# Altium PCB 400797.PcbDoc (part 8 of 8)
Units mm, origin at the board's own origin, x right, y up, seen from the top; angles counter-clockwise.
Board outline 155 x 63.5 mm, 4 copper layers (Top Layer, Mid-Layer 1, Mid-Layer 2, Bottom Layer), stack 1.514 mm thick; 333 components, 292 nets, 1555 pads, 2205 vias.
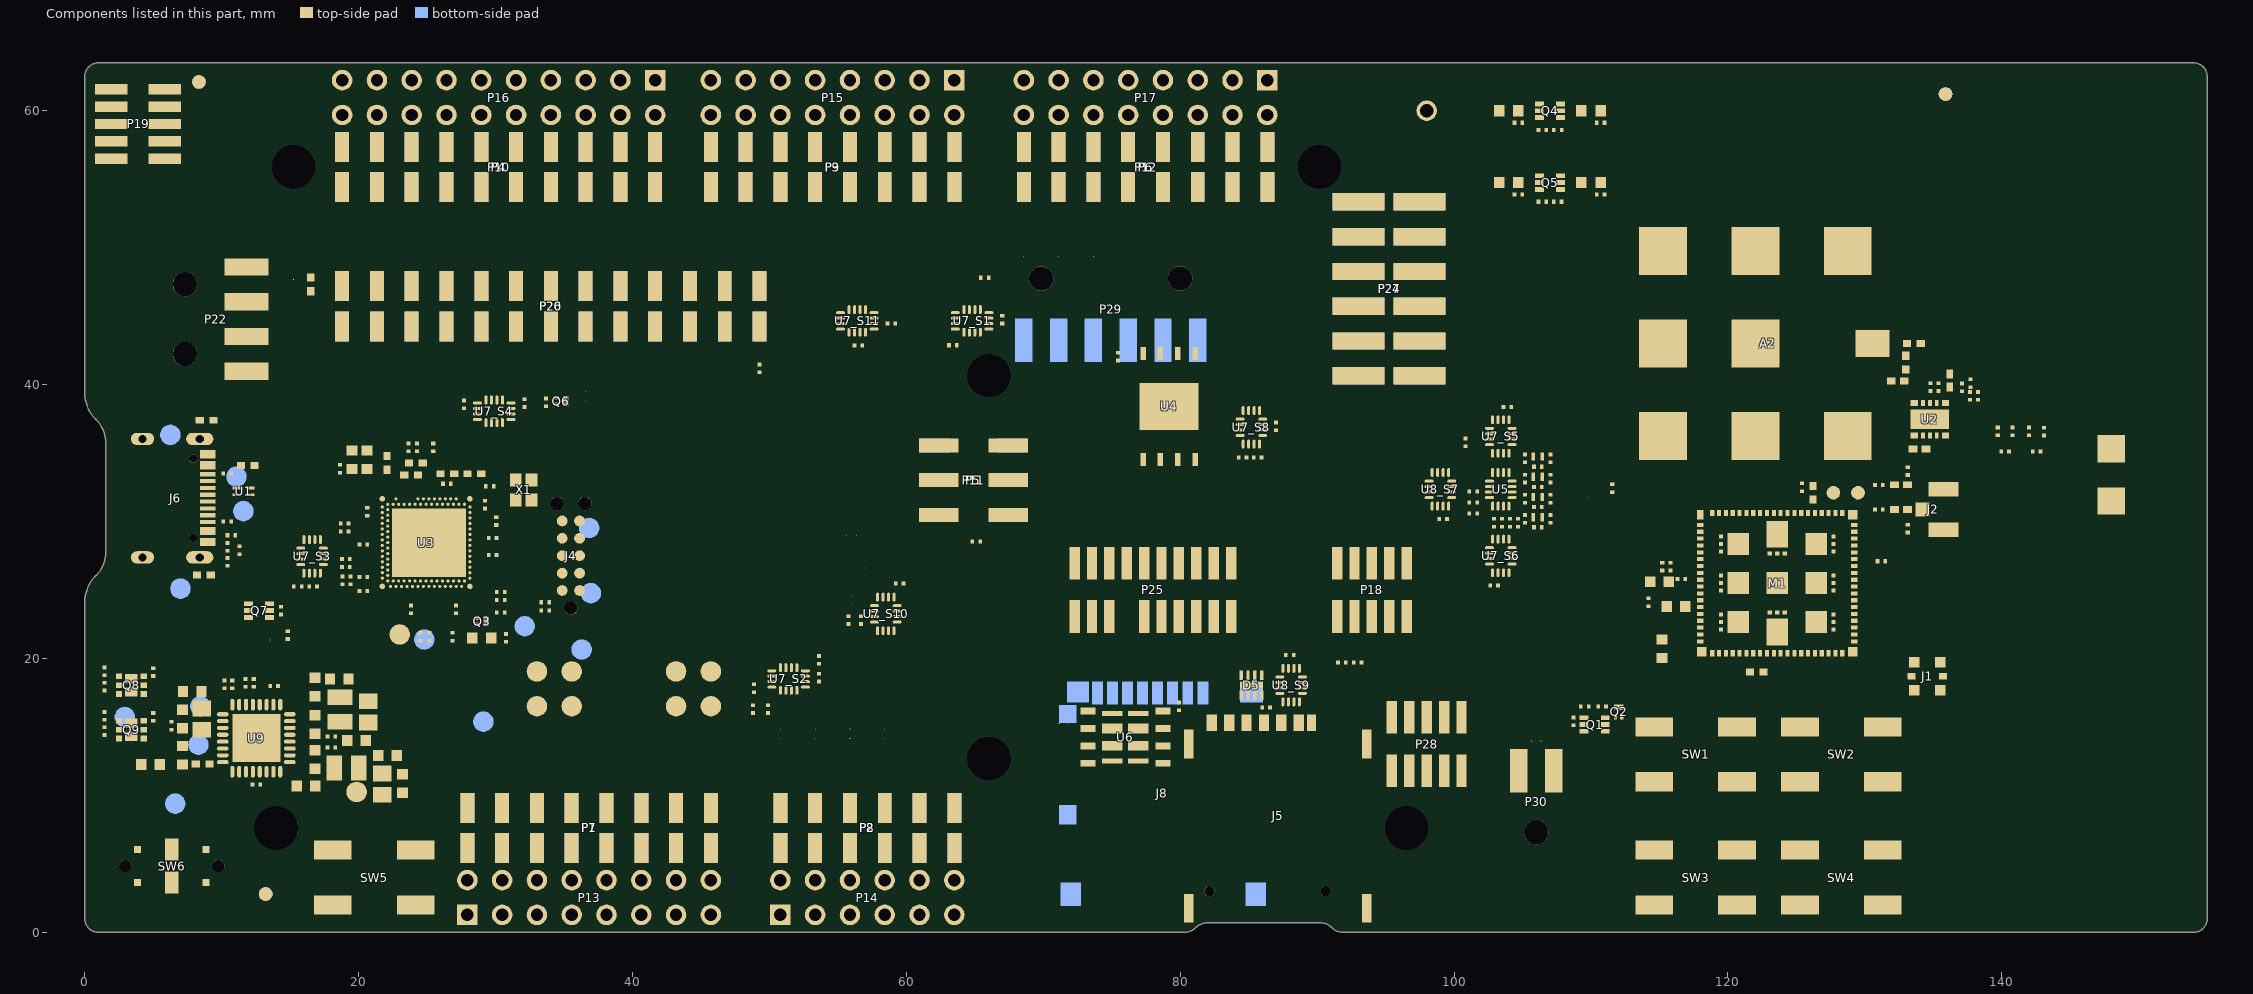
[diagram p8: the components of this part, seen from the top]

## Other copper
Top Layer:
  rectangle net GND: 141.732,30.087 142.85,34.416
  rectangle net GND: 141.732,36.867 142.85,38.837
  region net VIN:5V: 39.626,46.225 38.606,46.225 38.606,45.225 39.626,45.225
  region net VDD_nRF: 42.166,46.225 41.146,46.225 41.146,45.225 42.166,45.225
  region net VDD_1V8: 14.7,12.575 14.7,11.25 ccw(c16.45,11.25) 16.45,9.5 20.025,9.5 ccw(c20.025,10.075) 20.6,10.075 20.6,12.907 19.432,12.907 19.432,11.032 cw(c19.1,11.032) 19.1,10.7 ccw(c19.1,10.5) 18.9,10.5 18.9,10.3 cw(c18.725,10.3) 18.725,10.125 16.3,10.125 cw(c16.3,10.6) 15.825,10.6 15.825,11.605 15.25,12.085 15.25,12.575
  region net NetC70_2: 21.506,10.572 21.506,10.574 23.622,10.574 ccw(c23.622,11.071) 24.119,11.071 cw(c24.147,11.071) 24.147,11.099 25.011,11.099 cw(c25.011,11.023) 25.087,11.023 25.087,9.687 cw(c24.9,9.687) 24.9,9.5 21.074,9.5 cw(c21.074,9.522) 21.052,9.522 21.052,10.572
  region net VDD_1V8: 19.432,12.907 20.662,12.907 ccw(c20.662,13.297) 21.052,13.297 21.802,13.297 21.802,12.497 ccw(c22.177,12.497) 22.177,12.122 22.402,12.122 22.402,11.072 19.432,11.072
  region net NetC59_2: 16.427,18.959 cw(c16.465,18.959) 16.465,18.997 18.402,18.997 18.402,18.197 ccw(c18.874,18.197) 18.874,17.725 21.05,17.725 cw(c21.05,17.4) 21.375,17.4 21.375,16.35 20.025,16.35 ccw(c19.78,16.35) 19.78,16.595 17.715,16.595 17.715,17.725 ccw(c17.231,17.725) 17.231,18.209 16.427,18.209
  region net VSYS: 7.852,15.822 7.852,16.872 ccw(c7.852,17.172) 8.152,17.172 8.152,19.4 8.902,19.4 8.902,17.172 ccw(c9.202,17.172) 9.202,16.872 9.202,15.822
  region net VSYS: 14.975,14.075 14.975,13.775 15.405,13.775 cw(c15.405,13.265) 15.747,13.643 cw(c11.993,9.492) 16.416,12.922 17.227,12.922 17.227,14.872 16.416,14.872 cw(c13.851,16.715) 15.837,14.259 cw(c15.317,14.902) 15.317,14.075
  region net NetC57_2: 6.725,14.525 6.725,15.275 9.2,15.275 ccw(c10.306,15.578) 9.75,14.575 10.15,14.575 10.15,14.275 6.975,14.275 cw(c6.975,14.525)
  region net VDD_5V: 6.7,13.975 6.7,13.25 ccw(c6.725,13.25) 6.725,13.225 8.165,13.225 ccw(c8.165,13.431) 8.31,13.285 8.697,13.672 cw(c8.946,13.423) 8.946,13.775 10.325,13.775 10.325,14.075 6.8,14.075 ccw(c6.8,13.975)
  region net VIN:5V: 2.27,15.24 2.27,16.145 cw(c2.65,16.145) 2.65,16.525 4.15,16.525 cw(c4.15,16.2) 4.475,16.2 cw(c4.15,16.2) 4.15,15.875 2.935,15.875 ccw(c2.935,15.66) 2.72,15.66 2.72,15.24
  region net VDD_nRF: 111.048,31.745 111.05,31.747 111.05,31.89 cw(c111.256,31.89) 111.11,32.035 111.307,32.232 cw(c111.41,32.129) 111.41,32.275 111.679,32.275 cw(c111.679,32.104) 111.8,32.225 112.007,32.018 cw(c111.906,31.916) 112.049,31.916 112.049,31.742
  region net VDD_5V: 43.446,42.581 44.946,42.581 cw(c44.946,42.256) 45.271,42.256 cw(c44.946,42.256) 44.946,41.931 43.446,41.931 cw(c43.446,42.256) 43.121,42.256 cw(c43.446,42.256)
  region net VDD: 71.375,20.85 70.5,20.85 ccw(c70.5,20.35) 70,20.35 ccw(c70.5,20.35) 70.5,19.85 71.375,19.85
  region net VDD: 71.125,20.85 72,20.85 cw(c72,20.35) 72.5,20.35 cw(c72,20.35) 72,19.85 71.125,19.85
  region net VDD: 22.558,39.485 23.177,38.866 ccw(c23.53,39.22) 23.884,38.866 ccw(c23.53,39.22) 23.884,39.573 23.265,40.192
  region net VDD: 22.735,39.308 22.116,39.927 cw(c22.47,40.28) 22.116,40.634 cw(c22.47,40.28) 22.823,40.634 23.442,40.015
  region net VDD_5V: 16.144,38.66 16.144,36.749 cw(c15.819,36.751) 15.494,36.751 15.494,38.66 cw(c15.819,38.66) 15.819,38.985 cw(c15.819,38.66)
  pour cut-out: 17.859,10.3 17.859,11 17.232,11 17.232,10.3
  pour cut-out: 19.552,13.194 19.552,13.347 18.162,13.347 18.162,13.194
  pour cut-out: 19.552,14.447 19.552,14.6 18.162,14.6 18.162,14.447
  pour cut-out: 19.814,13.347 19.814,14.447 19.552,14.447 19.552,13.347
  pour cut-out: 18.162,13.347 18.162,14.447 17.9,14.447 17.9,13.347
  pour cut-out: 16.175,16.275 15.425,15.525 15.59,15.36 16.34,16.11
  pour cut-out: 16.241,15.499 15.491,14.749 15.592,14.648 16.342,15.398
  region net GND: 18.162,14.447 19.552,14.447 19.552,13.347 18.161,13.347
  region net GND: 14.9,14.8 15.54,14.8 16.24,15.5 17.227,15.5 17.227,17.316 16.423,17.316 16.423,16.222 15.305,15.067 14.9,15.067
  region net VDD_3V0: 20.152,13.597 20.152,14.397 20.023,14.822 20.023,15.85 21.379,15.85 21.379,13.597
  region net VDD_5V: 4.55,11.15 4.55,14.35 4.05,14.35 4.05,13.75 3.65,13.75 3.65,11.15
  pour cut-out: 16.405,11.795 15.425,12.775 15.324,12.674 16.305,11.694
  pour cut-out: 16.349,12.426 15.599,13.176 15.498,13.075 16.248,12.325
  pour cut-out: 19.432,11 19.432,13.029 18.792,13.029 18.792,11
  pour cut-out: 16.2,17.609 16.2,15.422 16.427,15.422 16.427,17.609
  region net GND: 17.227,10.3 16.425,10.3 16.425,11.775 15.425,12.775 15.1,12.775 15.1,13.075 15.498,13.075 16.248,12.325 17.227,12.325
  pour cut-out: 140.004,36.799 140.075,36.752 140.138,36.739 140.269,36.652 140.356,36.521 140.387,36.367 140.387,35.867 140.356,35.713 140.292,35.617 140.309,35.591 140.368,35.552 140.456,35.421 140.486,35.267 140.486,34.967 140.456,34.813 140.368,34.682 140.31,34.643 140.269,34.582 140.138,34.495 139.984,34.464 139.384,34.464 139.23,34.495 139.099,34.582 139.012,34.713 138.982,34.867 138.982,35.367 139.012,35.521 139.074,35.614 138.984,35.614 138.864,35.638 138.76,35.595 138.667,35.524 138.596,35.431 138.551,35.323 138.531,35.171 138.531,20.319 138.535,20.3 138.531,20.28 138.533,20.261 138.501,19.938 138.49,19.9 138.486,19.861 138.392,19.551 138.373,19.516 138.362,19.478 138.209,19.193 138.184,19.162 138.165,19.127 137.96,18.877 137.929,18.851 137.904,18.821 137.654,18.615 137.619,18.597 137.588,18.572 137.303,18.419 137.265,18.407 137.23,18.389 136.92,18.295 136.88,18.291 136.842,18.279 136.52,18.248 136.5,18.249 136.481,18.246 136.461,18.249 136.345,18.249 136.288,18.165 136.158,18.078 136.004,18.047 135.424,18.047 135.27,18.078 135.139,18.165 135.052,18.296 135.021,18.45 135.021,18.95 135.052,19.104 135.139,19.235 135.27,19.322 135.424,19.353 136.004,19.353 136.158,19.322 136.288,19.235 136.336,19.163 136.449,19.163 136.702,19.188 136.915,19.252 137.111,19.357 137.282,19.498 137.423,19.67 137.528,19.866 137.593,20.079 137.618,20.332 137.618,35.186 137.613,35.207 137.619,35.233 137.617,35.26 137.65,35.51 137.667,35.56 137.677,35.612 137.774,35.845 137.803,35.889 137.826,35.936 137.98,36.137 138.02,36.172 138.055,36.211 138.255,36.365 138.302,36.388 138.346,36.418 138.58,36.514 138.631,36.525 138.681,36.542 138.778,36.554 138.83,36.589 138.984,36.62 139.078,36.62 139.099,36.652 139.23,36.739 139.338,36.761 139.396,36.799 139.55,36.83 139.85,36.83
  pour cut-out: 30.6,22 30.1,22 30.1,21 30.6,21
  pour cut-out: 29.2,22 28.7,22 28.7,21 29.2,21
  region net 5V: 38.61,3.811 38.61,10.2 37.59,10.2 37.59,3.811
  region net FB2:VBUS: 10.3,26.9 11,26.9 11,27.7 11.6,27.7 11.6,26.7 11.2,26.3 10.3,26.3
  pour cut-out: 126.154,20.972 126.285,20.885 126.372,20.754 126.403,20.6 126.403,20.15 126.372,19.996 126.356,19.972 126.356,19.718 126.369,19.614 126.404,19.531 126.469,19.446 126.634,19.319 126.842,19.233 127.058,19.204 127.066,19.206 132.8,19.206 132.819,19.235 132.95,19.322 133.104,19.353 133.684,19.353 133.838,19.322 133.968,19.235 134.056,19.104 134.086,18.95 134.086,18.45 134.056,18.296 133.968,18.165 133.838,18.078 133.684,18.047 133.104,18.047 132.95,18.078 132.819,18.165 132.8,18.194 127.09,18.194 127.066,18.189 127.04,18.195 127.013,18.193 126.632,18.243 126.582,18.26 126.53,18.27 126.175,18.418 126.131,18.447 126.084,18.47 125.779,18.704 125.761,18.724 125.739,18.739 125.715,18.775 125.707,18.782 125.684,18.812 125.675,18.822 125.674,18.825 125.555,18.98 125.532,19.027 125.503,19.071 125.407,19.302 125.397,19.353 125.38,19.403 125.347,19.651 125.349,19.677 125.344,19.703 125.344,19.705 125.344,19.972 125.328,19.996 125.297,20.15 125.297,20.6 125.328,20.754 125.415,20.885 125.546,20.972 125.7,21.003 126,21.003
  pour cut-out: 133.434,29.702 133.565,29.615 133.652,29.484 133.683,29.33 133.683,29.06 133.652,28.906 133.643,28.892 133.643,28.132 133.642,28.131 133.642,22.85 133.638,22.83 133.64,22.811 133.607,22.478 133.596,22.44 133.592,22.401 133.495,22.081 133.476,22.046 133.465,22.008 133.308,21.714 133.282,21.683 133.264,21.648 133.052,21.39 133.021,21.365 132.996,21.334 132.738,21.122 132.703,21.104 132.672,21.078 132.378,20.921 132.34,20.91 132.305,20.891 131.985,20.794 131.946,20.79 131.908,20.779 131.575,20.746 131.556,20.748 131.536,20.744 129.628,20.744 129.604,20.728 129.45,20.697 129,20.697 128.846,20.728 128.715,20.815 128.628,20.946 128.597,21.1 128.597,21.4 128.628,21.554 128.715,21.685 128.846,21.772 129,21.803 129.45,21.803 129.604,21.772 129.609,21.769 131.536,21.769 131.539,21.768 131.747,21.789 131.95,21.85 132.137,21.95 132.301,22.085 132.436,22.249 132.536,22.436 132.597,22.639 132.618,22.847 132.617,22.85 132.617,28.131 132.617,28.132 132.617,28.892 132.608,28.906 132.577,29.06 132.577,29.33 132.608,29.484 132.695,29.615 132.826,29.702 132.98,29.733 133.28,29.733
  region net VDD_5V: 44.706,47.075 44.706,42.956 45.222,42.44 43.17,42.44 43.686,42.956 43.686,47.075
  pour cut-out: 30.792,34.199 30.792,30.466 33.104,30.466 33.104,34.199
  pour cut-out: 134.507,1.667 142.284,1.667 142.284,0.001 134.507,0.001
Mid-Layer 1:
  pour cut-out: 13.225,22.35 13.775,22.35 cw(c13.775,22) 14.125,22 14.125,21.425 cw(c13.775,21.425) 13.775,21.075 13.225,21.075 cw(c13.225,21.425) 12.875,21.425 12.875,22 cw(c13.225,22)
  pour cut-out: 131.28,31.205 132.395,31.205 cw(c132.395,31.045) 132.555,31.045 132.555,30.73 cw(c132.38,30.73) 132.38,30.555 131.295,30.555 cw(c131.295,30.747) 131.102,30.748 131.102,31.027 cw(c131.28,31.027)
  pour cut-out: 3.825,11.55 4.375,11.55 cw(c4.375,11.2) 4.725,11.2 4.725,10.625 cw(c4.375,10.625) 4.375,10.275 3.825,10.275 cw(c3.825,10.625) 3.475,10.625 3.475,11.2 cw(c3.825,11.2)
  pour cut-out: 84.625,29.525 84.625,28.975 cw(c84.275,28.975) 84.275,28.625 83.7,28.625 cw(c83.7,28.975) 83.35,28.975 83.35,29.525 cw(c83.7,29.525) 83.7,29.875 84.275,29.875 cw(c84.275,29.525)
  pour cut-out: 72.125,15.525 72.125,14.975 cw(c71.775,14.975) 71.775,14.625 71.2,14.625 cw(c71.2,14.975) 70.85,14.975 70.85,15.525 cw(c71.2,15.525) 71.2,15.875 71.775,15.875 cw(c71.775,15.525)
  pour cut-out: 72.125,13.525 72.125,12.975 cw(c71.775,12.975) 71.775,12.625 71.2,12.625 cw(c71.2,12.975) 70.85,12.975 70.85,13.525 cw(c71.2,13.525) 71.2,13.875 71.775,13.875 cw(c71.775,13.525)
  pour cut-out: 106.625,14.25 106.625,13.7 cw(c106.275,13.7) 106.275,13.35 105.7,13.35 cw(c105.7,13.7) 105.35,13.7 105.35,14.25 cw(c105.7,14.25) 105.7,14.6 106.275,14.6 cw(c106.275,14.25)
  pour cut-out: 56.275,29.856 55.725,29.856 cw(c55.725,30.206) 55.375,30.206 55.375,30.781 cw(c55.725,30.781) 55.725,31.131 56.275,31.131 cw(c56.275,30.781) 56.625,30.781 56.625,30.206 cw(c56.275,30.206)
  pour cut-out: 56.625,32.256 56.625,31.706 cw(c56.275,31.706) 56.275,31.356 55.7,31.356 cw(c55.7,31.706) 55.35,31.706 55.35,32.256 cw(c55.7,32.256) 55.7,32.606 56.275,32.606 cw(c56.275,32.256)
  pour cut-out: 56.625,29.256 56.625,28.706 cw(c56.275,28.706) 56.275,28.356 55.7,28.356 cw(c55.7,28.706) 55.35,28.706 55.35,29.256 cw(c55.7,29.256) 55.7,29.606 56.275,29.606 cw(c56.275,29.256)
  pour cut-out: 67.625,26.525 67.625,25.975 cw(c67.275,25.975) 67.275,25.625 66.7,25.625 cw(c66.7,25.975) 66.35,25.975 66.35,26.525 cw(c66.7,26.525) 66.7,26.875 67.275,26.875 cw(c67.275,26.525)
  pour cut-out: 67.625,28.025 67.625,27.475 cw(c67.275,27.475) 67.275,27.125 66.7,27.125 cw(c66.7,27.475) 66.35,27.475 66.35,28.025 cw(c66.7,28.025) 66.7,28.375 67.275,28.375 cw(c67.275,28.025)
  pour cut-out: 58.775,25.625 58.225,25.625 cw(c58.225,25.975) 57.875,25.975 57.875,26.55 cw(c58.225,26.55) 58.225,26.9 58.775,26.9 cw(c58.775,26.55) 59.125,26.55 59.125,25.975 cw(c58.775,25.975)
  pour cut-out: 57.275,25.625 56.725,25.625 cw(c56.725,25.975) 56.375,25.975 56.375,26.55 cw(c56.725,26.55) 56.725,26.9 57.275,26.9 cw(c57.275,26.55) 57.625,26.55 57.625,25.975 cw(c57.275,25.975)
  pour cut-out: 56.275,23.625 55.725,23.625 cw(c55.725,23.975) 55.375,23.975 55.375,24.55 cw(c55.725,24.55) 55.725,24.9 56.275,24.9 cw(c56.275,24.55) 56.625,24.55 56.625,23.975 cw(c56.275,23.975)
  pour cut-out: 58.725,20.875 59.275,20.875 cw(c59.275,20.525) 59.625,20.525 59.625,19.95 cw(c59.275,19.95) 59.275,19.6 58.725,19.6 cw(c58.725,19.95) 58.375,19.95 58.375,20.525 cw(c58.725,20.525)
  pour cut-out: 57.775,19.625 57.225,19.625 cw(c57.225,19.975) 56.875,19.975 56.875,20.55 cw(c57.225,20.55) 57.225,20.9 57.775,20.9 cw(c57.775,20.55) 58.125,20.55 58.125,19.975 cw(c57.775,19.975)
  pour cut-out: 58.145,15.125 58.695,15.125 cw(c58.695,14.775) 59.045,14.775 59.045,14.2 cw(c58.695,14.2) 58.695,13.85 58.145,13.85 cw(c58.145,14.2) 57.795,14.2 57.795,14.775 cw(c58.145,14.775)
  pour cut-out: 56.155,13.875 55.605,13.875 cw(c55.605,14.225) 55.255,14.225 55.255,14.8 cw(c55.605,14.8) 55.605,15.15 56.155,15.15 cw(c56.155,14.8) 56.505,14.8 56.505,14.225 cw(c56.155,14.225)
  pour cut-out: 53.065,15.125 53.615,15.125 cw(c53.615,14.775) 53.965,14.775 53.965,14.2 cw(c53.615,14.2) 53.615,13.85 53.065,13.85 cw(c53.065,14.2) 52.715,14.2 52.715,14.775 cw(c53.065,14.775)
  pour cut-out: 51.075,13.875 50.525,13.875 cw(c50.525,14.225) 50.175,14.225 50.175,14.8 cw(c50.525,14.8) 50.525,15.15 51.075,15.15 cw(c51.075,14.8) 51.425,14.8 51.425,14.225 cw(c51.075,14.225)
  pour cut-out: 24.325,11.825 24.875,11.825 cw(c24.875,11.475) 25.225,11.475 25.225,10.9 cw(c24.875,10.9) 24.875,10.55 24.325,10.55 cw(c24.325,10.9) 23.975,10.9 23.975,11.475 cw(c24.325,11.475)
  pour cut-out: 23.938,12.175 23.938,12.725 cw(c24.288,12.725) 24.288,13.075 24.863,13.075 cw(c24.863,12.725) 25.213,12.725 25.213,12.175 cw(c24.863,12.175) 24.863,11.825 24.287,11.825 cw(c24.287,12.175)
  pour cut-out: 26.8,11.475 26.8,10.925 cw(c26.45,10.925) 26.45,10.575 25.875,10.575 cw(c25.875,10.925) 25.525,10.925 25.525,11.475 cw(c25.875,11.475) 25.875,11.825 26.45,11.825 cw(c26.45,11.475)
  pour cut-out: 9.125,56.975 9.125,57.525 cw(c9.475,57.525) 9.475,57.875 10.05,57.875 cw(c10.05,57.525) 10.4,57.525 10.4,56.975 cw(c10.05,56.975) 10.05,56.625 9.475,56.625 cw(c9.475,56.975)
  pour cut-out: 9.125,58.82 9.125,59.37 cw(c9.475,59.37) 9.475,59.72 10.05,59.72 cw(c10.05,59.37) 10.4,59.37 10.4,58.82 cw(c10.05,58.82) 10.05,58.47 9.475,58.47 cw(c9.475,58.82)
  pour cut-out: 15.515,46.694 14.965,46.694 cw(c14.965,47.044) 14.615,47.044 14.615,47.619 cw(c14.965,47.619) 14.965,47.969 15.515,47.969 cw(c15.515,47.619) 15.865,47.619 15.865,47.044 cw(c15.515,47.044)
  pour cut-out: 19.791,39.773 20.341,39.773 cw(c20.341,39.423) 20.691,39.423 20.691,38.848 cw(c20.341,38.848) 20.341,38.498 19.791,38.498 cw(c19.791,38.848) 19.441,38.848 19.441,39.423 cw(c19.791,39.423)
  pour cut-out: 36.3,39.787 36.85,39.787 cw(c36.85,39.437) 37.2,39.437 37.2,38.862 cw(c36.85,38.862) 36.85,38.512 36.3,38.512 cw(c36.3,38.862) 35.95,38.862 35.95,39.438 cw(c36.3,39.438)
  pour cut-out: 73.935,41.58 73.385,41.58 cw(c73.385,41.93) 73.035,41.93 73.035,42.505 cw(c73.385,42.505) 73.385,42.855 73.935,42.855 cw(c73.935,42.505) 74.285,42.505 74.285,41.93 cw(c73.935,41.93)
  pour cut-out: 73.385,49.625 73.935,49.625 cw(c73.935,49.275) 74.285,49.275 74.285,48.7 cw(c73.935,48.7) 73.935,48.35 73.385,48.35 cw(c73.385,48.7) 73.035,48.7 73.035,49.275 cw(c73.385,49.275)
  pour cut-out: 70.845,49.625 71.395,49.625 cw(c71.395,49.275) 71.745,49.275 71.745,48.7 cw(c71.395,48.7) 71.395,48.35 70.845,48.35 cw(c70.845,48.7) 70.495,48.7 70.495,49.275 cw(c70.845,49.275)
  pour cut-out: 68.305,49.625 68.855,49.625 cw(c68.855,49.275) 69.205,49.275 69.205,48.7 cw(c68.855,48.7) 68.855,48.35 68.305,48.35 cw(c68.305,48.7) 67.955,48.7 67.955,49.275 cw(c68.305,49.275)
  pour cut-out: 104.098,51.076 104.098,50.526 cw(c103.748,50.526) 103.748,50.176 103.173,50.176 cw(c103.173,50.526) 102.823,50.526 102.823,51.076 cw(c103.172,51.076) 103.173,51.426 103.748,51.426 cw(c103.748,51.076)
  pour cut-out: 110.075,28.563 109.525,28.563 cw(c109.525,28.913) 109.175,28.913 109.175,29.488 cw(c109.525,29.488) 109.525,29.838 110.075,29.838 cw(c110.075,29.488) 110.425,29.488 110.425,28.912 cw(c110.075,28.912)
  pour cut-out: 110.075,30.75 109.525,30.75 cw(c109.525,31.1) 109.175,31.1 109.175,31.675 cw(c109.525,31.675) 109.525,32.025 110.075,32.025 cw(c110.075,31.675) 110.425,31.675 110.425,31.1 cw(c110.075,31.1)
  pour cut-out: 135.647,36.572 136.128,36.572 cw(c136.128,36.475) 136.225,36.475 136.225,36.075 cw(c136.122,36.075) 136.122,35.972 135.653,35.972 cw(c135.653,36.075) 135.55,36.075 135.55,36.475 cw(c135.647,36.475)
  pour cut-out: 134.175,35.625 134.775,35.625 cw(c134.775,35.525) 134.875,35.525 134.875,35.075 cw(c134.775,35.075) 134.775,34.975 134.175,34.975 cw(c134.175,35.075) 134.075,35.075 134.075,35.525 cw(c134.175,35.525)
  pour cut-out: 133.225,35.625 133.825,35.625 cw(c133.825,35.525) 133.925,35.525 133.925,35.075 cw(c133.825,35.075) 133.825,34.975 133.225,34.975 cw(c133.225,35.075) 133.125,35.075 133.125,35.525 cw(c133.225,35.525)
  pour cut-out: 133.787,18.357 133,18.357 133,19.043 133.787,19.043
  pour cut-out: 135,17.301 134.1,17.306 134.1,18.1 133.1,18.1 133.103,19.3 134.1,19.3 134.1,20.1 135,20.1 135,19.3 136,19.3 136,18.1 135,18.1
  pour cut-out: 135.32,19.043 136.107,19.043 136.107,18.357 135.32,18.357
  pour cut-out: 133.3,39.925 132.5,39.925 132.5,40.575 133.3,40.575
  pour cut-out: 133.325,41.5 133.325,40.7 132.675,40.7 132.675,41.5
  pour cut-out: 133.325,42.5 133.325,41.7 132.675,41.7 132.675,42.5
  pour cut-out: 133.5,42.675 132.7,42.675 132.7,43.325 133.5,43.325
  pour cut-out: 133.264,38.947 133.939,38.947 133.939,38.347 133.264,38.347
  pour cut-out: 133.505,31.555 137.03,31.555 137.03,30.23 133.505,30.23
  pour cut-out: 131.102,33.005 132.555,33.005 132.555,32.355 131.102,32.355
  pour cut-out: 132.705,33.005 133.505,33.005 133.505,32.355 132.705,32.355
  pour cut-out: 132.705,31.205 133.505,31.205 133.505,30.555 132.705,30.555
  pour cut-out: 133.355,29.978 133.355,29.553 132.905,29.553 132.905,29.978
  pour cut-out: 133.355,29.408 133.355,28.983 132.905,28.983 132.905,29.408
  pour cut-out: 132.905,33.753 132.905,34.178 133.355,34.178 133.355,33.753
  pour cut-out: 132.905,33.183 132.905,33.608 133.355,33.608 133.355,33.183
  pour cut-out: 134.507,1.667 142.284,1.667 142.284,0.001 134.507,0.001
Mid-Layer 2:
  region net VDD_nRF: 111,32.2 112.1,32.2 cw(c112.1,32) 112.3,32 112.3,31.4 110.8,31.4 110.8,32 cw(c111,32)
  region net VDD_5V: 15.494,36.75 15.494,38.25 cw(c15.819,38.25) 15.819,38.575 cw(c15.819,38.25) 16.144,38.25 16.144,36.75 cw(c15.819,36.75) 15.819,36.425 cw(c15.819,36.75)
  region net VIN:5V: 38.791,44.221 38.791,45.721 cw(c39.116,45.721) 39.116,46.046 cw(c39.116,45.721) 39.441,45.721 39.441,44.221 cw(c39.116,44.221) 39.116,43.896 cw(c39.116,44.221)
  region net VDD_5V: 43.446,42.581 44.946,42.581 cw(c44.946,42.256) 45.271,42.256 cw(c44.946,42.256) 44.946,41.931 43.446,41.931 cw(c43.446,42.256) 43.121,42.256 cw(c43.446,42.256)
  region net VDD: 23.301,38.99 22.24,40.051 cw(c22.47,40.28) 22.24,40.51 cw(c22.47,40.28) 22.699,40.51 23.76,39.449 cw(c23.53,39.22) 23.76,38.99 cw(c23.53,39.22)
  region net VDD: 71.375,20.85 70.5,20.85 ccw(c70.5,20.35) 70,20.35 ccw(c70.5,20.35) 70.5,19.85 71.375,19.85
  region net VDD: 71.125,20.85 72,20.85 cw(c72,20.35) 72.5,20.35 cw(c72,20.35) 72,19.85 71.125,19.85
  region net 5V: 66.972,35.236 68.472,35.236 ccw(c68.472,35.561) 68.797,35.561 ccw(c68.472,35.561) 68.472,35.886 66.972,35.886 ccw(c66.972,35.561) 66.647,35.561 ccw(c66.972,35.561)
  region net VIN:5V: 14.719,36.75 14.719,38.25 cw(c15.044,38.25) 15.044,38.575 cw(c15.044,38.25) 15.369,38.25 15.369,36.75 cw(c15.044,36.75) 15.044,36.425 cw(c15.044,36.75)
  region net VDD: 22.411,38.439 22.723,38.752 cw(c23.068,38.406) 23.068,38.895 23.595,38.895 22.145,40.345 22.145,39.793 cw(c21.717,39.793) 22.019,39.491 21.689,39.161
  pour cut-out: 134.507,1.667 142.284,1.667 142.284,0.001 134.507,0.001
Bottom Layer:
  rectangle net GND: 141.834,30.325 142.951,38.812
  rectangle net VIN:5V: 38.606,45.225 39.626,46.225
  rectangle net VDD_nRF: 41.146,45.225 42.166,46.225
  region net VDD_nRF: 112.1,31.3 111,31.3 cw(c111,31.5) 110.8,31.5 110.8,32.8 111.782,32.8 112.3,32.282 112.3,31.5 cw(c112.1,31.5)
  region net 5V: 55.425,20.5 55.425,22 cw(c55.75,22) 55.75,22.325 cw(c55.75,22) 56.075,22 56.075,20.5 cw(c55.75,20.5) 55.75,20.175 cw(c55.75,20.5)
  region net VDD_5V: 43.446,42.581 44.946,42.581 cw(c44.946,42.256) 45.271,42.256 cw(c44.946,42.256) 44.946,41.931 43.446,41.931 cw(c43.446,42.256) 43.121,42.256 cw(c43.446,42.256)
  region net VDD: 22.735,39.308 22.116,39.927 cw(c22.47,40.28) 22.116,40.634 cw(c22.47,40.28) 22.823,40.634 23.442,40.015
  region net VDD: 22.558,39.485 23.177,38.866 ccw(c23.53,39.22) 23.884,38.866 ccw(c23.53,39.22) 23.884,39.573 23.265,40.192
  region net VIN:5V: 14.719,36.75 14.719,38.25 cw(c15.044,38.25) 15.044,38.575 cw(c15.044,38.25) 15.369,38.25 15.369,36.75 cw(c15.044,36.75) 15.044,36.425 cw(c15.044,36.75)
  region net VDD_5V: 16.144,38.25 16.144,36.75 cw(c15.819,36.75) 15.819,36.425 cw(c15.819,36.75) 15.494,36.75 15.494,38.25 cw(c15.819,38.25) 15.819,38.575 cw(c15.819,38.25)
  region net VSYS: 16.947,13.638 16.947,17.25 9.011,17.25 9.011,19.089 ccw(c8.647,19.089) 8.647,19.453 8.528,19.453 ccw(c8.528,19.125) 8.2,19.125 8.2,15.925 15.5,15.925 15.5,13.638
  region net 5V: 37.59,3.811 37.59,9.3 38.61,9.3 38.61,3.811
  region net VDD_5V: 43.686,47.075 43.686,42.956 43.17,42.44 45.222,42.44 44.706,42.956 44.706,47.075
  region: 147.207,48.236 147.207,48.998 147.735,48.998 147.735,48.236
  pour cut-out: 134.507,1.667 142.284,1.667 142.284,0.001 134.507,0.001
Multi-Layer:
  pour cut-out: 142.284,51.067 138.063,51.067 138.063,63.501 142.284,63.501

## Silkscreen, mask and mechanical layers (free items; w line width, h text height)
Top Overlay:
  circle w0.254: c88.113,54.367 r0.127
  circle w0.254: c65.278,54.357 r0.127
  circle w0.254: c43.434,54.357 r0.127
  circle w0.254: c26.162,9.145 r0.127
  circle w0.254: c49.022,9.145 r0.127
  region: 78.374,9.074 78.374,8.33 73.156,8.362 74.122,9.329 78.119,9.329
  region: 78.296,3.108 78.296,2.248 78.119,2.071 73.281,2.071 73.104,2.248 73.174,2.318 73.174,3.13 78.274,3.13
  lines w0.1: 9.3,19.5 5.9,19.5 5.9,9.7 18.1,9.7 ; 11.4,19.5 21.7,19.5 21.7,14.3 ; 23.9,9.7 23.9,14.3 21.7,14.3 ; 21.7,14.3 21.7,14.3 ; 18.1,32.8 19.7,32.8 19.7,22.8 27.9,22.8 27.9,24.6 29.7,24.6 29.7,27 30.7,27 30.7,30.4 33.3,30.4 33.3,34.8 22.7,34.8 22.7,35.9 18.1,35.9 18.1,32.8
  lines w0.15: 37.084,17.78 41.656,17.78 ; 39.37,15.494 39.37,20.066 ; 37.084,15.494 37.084,20.066 41.656,20.066 41.656,15.494 37.084,15.494
  lines w0.25: 73.104,8.237 73.104,2.248 ccw(c73.281,2.248) 73.281,2.071 78.119,2.071 ccw(c78.119,2.248) 78.296,2.248 78.296,9.152 ccw(c78.119,9.152) 78.119,9.329 74.195,9.329 ; 73.155,8.362 74.07,9.277
  lines w0.254: 12.38,60.961 92.837,60.961 ; 14.224,62.231 17.018,62.231 ; 16.764,62.231 16.256,62.485 16.256,61.977 17.018,62.231 ; 26.67,2.541 67.996,2.541 ; 65.481,1.232 65.989,0.978 65.989,1.486 65.227,1.232 ; 68.021,1.232 65.227,1.232 ; 88.341,62.192 88.849,61.938 88.849,62.446 88.087,62.192 ; 90.881,62.192 88.087,62.192 ; 17.018,62.231 16.256,61.723 16.256,62.739 17.018,62.231 ; 65.227,1.232 65.989,0.724 65.989,1.74 65.227,1.232 ; 88.087,62.192 88.849,62.7 88.849,61.684 88.087,62.192
  text "'.PCBnumber'" at 138.776,61.712 h2.03
  text "GND" at 10.662,61.695 h1.78
  text "GND" at 91.198,61.656 h1.78
  text "'.PCBrevision'" at 138.842,60.492 h1.52
  text "GND" at 96.383,57.564 h1.78
  text "DEBUG OUT" at 0.418,53.688 h1.8
  text "'.Productname'" at 115.825,53.45 h3
  text "COEX1" at 99.601,52.949 h1.3
  text "COEX0" at 87.337,52.919 h1.3
  text "COEX2" at 87.421,50.484 h1.3
  text "P0.11" at 34.537,50.465 h1.7 r90
  text "P0.29" at 99.601,50.418 h1.3
  text "nRF CURRENT / MEASUREMENT" at 0.418,50.296 h1.8
  text "P0.21" at 86.861,50.189 h1.7 r90
  text "P0.31" at 19.297,50.168 h1.7 r90
  text "GND" at 26.928,50.111 h1.7 r90
  text "P0.12" at 31.997,50.096 h1.7 r90
  text "P0.01" at 61.461,50.076 h1.7 r90
  text "P0.13" at 29.457,50.066 h1.7 r90
  text "P0.10" at 37.077,49.986 h1.7 r90
  text "P0.27" at 71.621,49.856 h1.7 r90
  text "P0.22" at 84.321,49.82 h1.7 r90
  text "P0.25" at 76.701,49.774 h1.7 r90
  text "P0.23" at 81.781,49.79 h1.7 r90
  text "P0.28" at 69.081,49.756 h1.7 r90
  text "P0.26" at 74.161,49.747 h1.7 r90
  text "P0.07" at 46.221,49.743 h1.7 r90
  text "P0.24" at 79.241,49.741 h1.7 r90
  text "P0.20" at 24.377,49.71 h1.7 r90
  text "P0.02" at 58.921,49.707 h1.7 r90
  text "P0.30" at 21.837,49.689 h1.7 r90
  text "P0.03" at 56.381,49.677 h1.7 r90
  text "P0.09" at 39.617,49.653 h1.7 r90
  text "P0.08" at 42.157,49.643 h1.7 r90
  text "P0.05" at 51.301,49.661 h1.7 r90
  text "P0.06" at 48.761,49.634 h1.7 r90
  text "P0.04" at 53.841,49.628 h1.7 r90
  text "P0.00" at 64.001,49.597 h1.7 r90
  text "VDD_nRF" at 0.6,49.229 h1.4
  text "SDATA" at 87.421,47.944 h1.3
  text "SCLK" at 99.601,47.869 h1.3
  text "VDD_5V" at 0.6,46.689 h1.4
  text "VIO" at 89.07,45.413 h1.27
  text "GND" at 99.601,45.329 h1.3
  text "NC" at 0.6,44.149 h1.4
  text "MAGPIO0" at 85.869,42.864 h1.3
  text "MAGPIO1" at 99.601,42.789 h1.3
  text "ID" at 49.667,41.989 h1.3 r90
  text "GND" at 0.6,41.609 h1.4
  text "SEL" at 36.968,41.194 h1.3 r90
  text "VIO / REF" at 47.721,40.96 h1.3 r90
  text "VTG" at 24.268,40.743 h1.3 r90
  text "VDD" at 21.727,40.669 h1.3 r90
  text "VDD / nRF" at 42.625,40.581 h1.3 r90
  text "VDD / 5V" at 45.165,40.581 h1.3 r90
  text "VIN / 5V" at 40.094,40.49 h1.3 r90
  text "VDD / GPIO" at 19.765,40.383 h1.3 r90
  text "SWD / IO" at 27.416,40.341 h1.3 r90
  text "SWD / CLK" at 29.956,40.341 h1.3 r90
  text "MAGPIO2" at 85.953,40.324 h1.3
  text "SWO" at 31.888,40.312 h1.3 r90
  text "GND" at 99.601,40.249 h1.3
  text "RESET" at 34.428,39.933 h1.3 r90
  text "DEBUGGER" at 18.059,35.911 h1.8
  text "P0.12" at 57.761,35.103 h1.52
  text "5V" at 69.199,35.051 h1.52
  text "P0.11" at 69.197,32.589 h1.52
  text "P0.13" at 57.735,32.563 h1.52
  text "DETECT" at 69.197,30.091 h1.52
  text "RESET" at 57.107,30.02 h1.52
  text "TRACE" at 73.5,28.65 h1.8
  text "DEBUG IN" at 89.5,28.65 h1.8
  text "GPS" at 133.85,26.95 h1.8
  text "DEBUGGER" at 1.3,23.55 h1.8
  text "VCOM0" at 31.29,21.15 h1.8
  text "VCOM1" at 41.45,21.15 h1.8
  text "LTE" at 133.75,20.45 h1.8
  text "nPM1300" at 15.249,19.47 h1.8
  text "TxD" at 37.298,18.54 h1.27
  text "RxD" at 39.577,18.54 h1.27
  text "SIM / INTERFACE" at 93.685,17.35 h1.8
  text "MFF2 UICC" at 71.326,17.15 h1.8
  text "CTS" at 37.317,16.254 h1.27
  text "RTS" at 39.666,16.254 h1.27
  text "BUTTON 1" at 113.14,16.15 h1.8
  text "BUTTON 2" at 123.79,16.15 h1.8
  text "VDD" at 28.451,10.301 h1.7 r90
  text "VDD" at 30.991,10.301 h1.7 r90
  text "RESET" at 33.532,10.301 h1.7 r90
  text "VDD" at 36.071,10.301 h1.7 r90
  text "5V" at 38.601,10.301 h1.7 r90
  text "GND" at 41.152,10.301 h1.7 r90
  text "GND" at 43.692,10.301 h1.7 r90
  text "N.C." at 46.232,10.301 h1.7 r90
  text "P0.14" at 51.301,10.301 h1.7 r90
  text "P0.15" at 53.841,10.301 h1.7 r90
  text "P0.16" at 56.381,10.301 h1.7 r90
  text "P0.17" at 58.921,10.301 h1.7 r90
  text "P0.18" at 61.461,10.301 h1.7 r90
  text "P0.19" at 64.001,10.301 h1.7 r90
  text "POWER" at 1.85,7.15 h1.8
  text "RESET" at 16.636,7.15 h1.8
  text "BUTTON 3" at 113.14,7.15 h1.8
  text "BUTTON 4" at 123.79,7.15 h1.8
  text "NANO / SIM / CARD" at 78.2,2.95 h1.8 r90
  text "GND" at 68.338,0.696 h1.78
  text "OFF" at 0.75,0.65 h1.8
  text "ON" at 8.5,0.65 h1.8
  text "For evaluation only; / not FCC approved for resale." at 145.852,0.413 h1.52 r90
  text "SIM CURRENT / MEASUREMENT" at 111.8,0.25 h1.8 r90
Bottom Overlay:
  drawing of 353 lines, arcs and shapes, not listed
  text "IOEXP_SCL" at 111.914,62.501 h1.91 r180
  text "P0.31" at 106.351,62.417 h1.91 r180
  text "P0.19" at 122.935,62.418 h1.91 r180
  text "Button 4" at 128.443,62.41 h1.91 r180
  text "nRF91" at 139.306,60.613 h2.03 r180
  text "IOEXP_SDA" at 111.736,59.961 h1.91 r180
  text "P0.30" at 106.083,59.877 h1.91 r180
  text "P0.18" at 122.931,59.878 h1.91 r180
  text "Button 3" at 128.471,59.87 h1.91 r180
  text "IOEXP_IRQ" at 111.942,57.421 h1.91 r180
  text "P0.19" at 106.28,57.337 h1.91 r180
  text "P0.09" at 122.719,57.337 h1.91 r180
  text "Button 2" at 128.489,57.337 h1.91 r180
  text "I2C" at 144.164,56.773 h1.78 r180
  text "GPIO" at 106.02,54.787 h2.03 r180
  text "Function" at 112.795,54.784 h2.03 r180
  text "P0.08" at 122.721,54.797 h1.91 r180
  text "Button 1" at 128.696,54.797 h1.91 r180
  text "BC" at 146.638,54.572 h1.78 r180
  text "COEX1" at 99.601,53.723 h1.27 r180
  text "COEX0" at 87.418,53.694 h1.27 r180
  text "P0.28" at 69.063,53.323 h1.78 r90
  text "P0.26" at 74.143,53.322 h1.78 r90
  text "P0.25" at 76.683,53.305 h1.78 r90
  text "P0.24" at 79.223,53.318 h1.78 r90
  text "P0.23" at 81.763,53.304 h1.78 r90
  text "P0.22" at 84.303,53.294 h1.78 r90
  text "P0.27" at 71.603,53.271 h1.78 r90
  text "P0.31" at 19.283,53.155 h1.65 r90
  text "P0.30" at 21.823,53.155 h1.65 r90
  text "P0.20" at 24.363,53.155 h1.65 r90
  text "GND" at 26.914,53.155 h1.65 r90
  text "P0.13" at 29.443,53.155 h1.65 r90
  text "P0.12" at 31.983,53.155 h1.65 r90
  text "P0.11" at 34.523,53.155 h1.65 r90
  text "P0.10" at 37.063,53.155 h1.65 r90
  text "P0.09" at 39.603,53.156 h1.65 r90
  text "P0.08" at 42.143,53.155 h1.65 r90
  text "P0.07" at 46.207,53.155 h1.65 r90
  text "P0.06" at 48.747,53.155 h1.65 r90
  text "P0.05" at 51.287,53.155 h1.65 r90
  text "P0.04 (D4)" at 53.74,53.159 h1.65 r90
  text "P0.03 (D3)" at 56.28,53.159 h1.65 r90
  text "P0.02 (D2)" at 58.82,53.158 h1.65 r90
  text "P0.01 (D1)" at 61.36,53.158 h1.65 r90
  text "P0.00 (ARDUINO D0)" at 63.9,53.166 h1.65 r90
  text "P0.21" at 86.818,53.172 h1.78 r90
  text "PIN" at 136.916,52.759 h1.78 r180
  text "LED 4" at 129.466,52.259 h1.91 r180
  text "(SCL)" at 20.466,52.251 h1.65 r90
  text "(SDA)" at 23.006,52.251 h1.65 r90
  text "(AREF)" at 25.546,52.251 h1.65 r90
  text "(D13)" at 30.626,52.251 h1.65 r90
  text "(D12)" at 33.166,52.25 h1.65 r90
  text "(D11)" at 35.706,52.25 h1.65 r90
  text "(D10)" at 38.246,52.251 h1.65 r90
  text "(D9)" at 40.786,52.25 h1.65 r90
  text "(D8)" at 43.326,52.25 h1.65 r90
  text "(D7)" at 47.39,52.25 h1.65 r90
  text "(D6)" at 49.93,52.25 h1.65 r90
  text "(D5)" at 52.47,52.25 h1.65 r90
  text "P0.05" at 122.736,52.257 h1.91 r180
  text "EXP" at 141.027,51.467 h1.52 r180
  text "COEX2" at 87.5,51.259 h1.27 r180
  text "P0.29" at 99.601,51.176 h1.27 r180
  text "P0.04" at 122.724,49.717 h1.91 r180
  text "LED 3" at 129.493,49.717 h1.91 r180
  text "SDATA" at 87.5,48.719 h1.27 r180
  text "SCLK" at 99.601,48.643 h1.27 r180
  text "BC" at 144.681,48.195 h1.78 r180
  text "LED 2" at 129.51,47.179 h1.91 r180
  text "P0.01" at 122.958,47.177 h1.91 r180
  text "*" at 105.642,47.118 h2.54 r180
  text "VIO" at 89.07,46.179 h1.27 r180
  text "GND" at 99.601,46.103 h1.27 r180
  text "*" at 114.151,45.213 h2.54 r180
  text "*" at 140.44,44.705 h2.54 r180
  text "LED 1" at 129.717,44.639 h1.91 r180
  text "P0.00" at 122.683,44.637 h1.91 r180
  text "VDD" at 105.472,44.378 h1.45 r180
  text "MAGPIO0" at 85.983,43.639 h1.27 r180
  text "MAGPIO1" at 99.601,43.563 h1.27 r180
  text "VDD / GPIO" at 19.765,43.209 h1.4 r90
  text "SWD / IO" at 27.416,43.014 h1.4 r90
  text "SWD / CLK" at 29.956,43.014 h1.4 r90
  text "VIN / 5V" at 40.094,43.029 h1.4 r90
  text "VDD / nRF" at 42.625,43.014 h1.4 r90
  text "VDD / 5V" at 45.165,43.014 h1.4 r90
  text "VDD" at 21.756,43.008 h1.4 r90
  text "VTG" at 24.296,43.008 h1.4 r90
  text "SWO" at 31.916,43.008 h1.4 r90
  text "RESET" at 34.456,43.007 h1.4 r90
  text "SEL" at 36.996,42.993 h1.4 r90
  text "VIO / REF" at 47.721,43.012 h1.4 r90
  text "ID" at 49.696,43.008 h1.4 r90
  text "LED" at 107.743,42.086 h2.03 r180
  text "Button" at 114.759,42.084 h2.03 r180
  text "GPIO" at 122.657,42.087 h2.03 r180
  text "Function" at 128.543,42.084 h2.03 r180
  text "Circuit" at 140.456,42.087 h2.03 r180
  text "MAGPIO2" at 86.065,41.099 h1.27 r180
  text "GND" at 99.601,41.023 h1.27 r180
  text "CTS2" at 129.938,38.8 h1.91 r180
  text "P0.17" at 123,38.795 h1.91 r180
  text "nRF91" at 137.528,36.992 h2.03 r180
  text "RTS2" at 130.032,36.26 h1.91 r180
  text "P0.16" at 122.945,36.255 h1.91 r180
  text "TxD2" at 129.91,33.717 h1.91 r180
  text "P0.29" at 122.682,33.715 h1.91 r180
  text "RESET" at 88.634,31.217 h1.91 r180
  text "RESET" at 95.644,31.217 h1.91 r180
  text "P0.21" at 102.392,31.216 h1.91 r180
  text "RxD2" at 129.898,31.177 h1.91 r180
  text "P0.28" at 122.773,31.175 h1.91 r180
  text "PIN" at 137.044,31.043 h1.78 r180
  text "nRF91" at 111.227,30.114 h2.03 r180
  text "AREF" at 88.893,28.677 h1.91 r180
  text "P0.20" at 95.838,28.677 h1.91 r180
  text "RESET" at 101.93,28.676 h1.91 r180
  text "P0.15" at 122.949,28.636 h1.91 r180
  text "CTS1" at 130.145,28.641 h1.91 r180
  text "DEF." at 109.335,28.122 h1.52 r180
  text "ALT." at 115.661,28.122 h1.52 r180
  text "BC" at 142.736,27.178 h1.78 r180
  text "D6" at 89.846,26.137 h1.91 r180
  text "P0.06" at 95.795,26.137 h1.91 r180
  text "COEX2" at 101.53,26.136 h1.91 r180
  text "PIN" at 117.577,26.135 h1.78 r180
  text "P0.14" at 122.923,26.096 h1.91 r180
  text "RTS1" at 130.239,26.101 h1.91 r180
  text "BC" at 117.577,23.885 h1.78 r180
  text "D3" at 89.87,23.597 h1.91 r180
  text "P0.03" at 95.82,23.597 h1.91 r180
  text "COEX1" at 101.737,23.596 h1.91 r180
  text "P0.27" at 122.832,23.557 h1.91 r180
  text "TxD1" at 130.117,23.558 h1.91 r180
  text "IF / MCU" at 139.562,22.741 h1.4 r180
  text "ARDUINO" at 110.893,21.221 h1.52 r180
  text "D2" at 89.887,21.057 h1.91 r180
  text "P0.02" at 95.836,21.057 h1.91 r180
  text "COEX0" at 101.469,21.056 h1.91 r180
  text "P0.26" at 122.772,21.017 h1.91 r180
  text "RxD1" at 130.105,21.018 h1.91 r180
  text "Arduino" at 87.735,18.491 h2.03 r180
  text "Default" at 95.059,18.491 h2.03 r180
  text "Alt." at 102.813,18.491 h2.03 r180
  text "Circuit" at 111.353,18.491 h2.03 r180
  text "GPIO" at 122.657,18.466 h2.03 r180
  text "Function" at 128.543,18.463 h2.03 r180
  text "Circuit" at 140.456,18.466 h2.03 r180
  text "P0.14 (A0)" at 51.2,16.523 h1.65 r90
  text "P0.18 (A4)" at 61.36,16.474 h1.65 r90
  text "P0.16 (A2)" at 56.28,16.398 h1.65 r90
  text "P0.19 (A5)" at 63.9,16.405 h1.65 r90
  text "P0.17 (A3)" at 58.82,16.309 h1.65 r90
  text "P0.15 (A1)" at 53.74,16.112 h1.65 r90
  text "P0.20" at 122.763,15.301 h1.91 r180
  text "CS" at 130.786,15.306 h1.91 r180
  text "nRF91" at 139.052,14.924 h2.03 r180
  text "RESET" at 33.518,14.063 h1.65 r90
  text "GND" at 41.138,13.339 h1.65 r90
  text "GND" at 43.678,13.339 h1.65 r90
  text "VDD" at 28.437,13.162 h1.65 r90
  text "VDD" at 30.977,13.162 h1.65 r90
  text "VDD" at 36.057,13.162 h1.65 r90
  text "N.C." at 46.256,13.024 h1.78 r90
  text "P0.13" at 122.952,12.761 h1.91 r180
  text "SCK" at 130.187,12.766 h1.91 r180
  text "PIN" at 136.415,12.271 h1.78 r180
  text "5V" at 38.587,11.988 h1.65 r90
  text "BC" at 144.865,11.207 h1.78 r180
  text "P0.12" at 122.963,10.221 h1.91 r180
  text "MISO" at 129.74,10.226 h1.91 r180
  text "EXT MEMORY" at 138.41,7.873 h1.52 r180
  text "P0.11" at 123.074,7.681 h1.91 r180
  text "MOSI" at 129.769,7.686 h1.91 r180
  text "GPIO" at 122.657,5.131 h2.03 r180
  text "Function" at 128.543,5.128 h2.03 r180
  text "Circuit" at 140.456,5.131 h2.03 r180
Board Outline:
  lines w0.2: 0.962,26.208 ccw(c-0.876,27.751) 1.524,27.751 ; 0.962,26.208 ccw(c-0.876,27.751) 1.524,27.751 ; 0.962,26.208 0.796,26.042 ccw(c2.717,24.121) 0,24.121 0,1 ccw(c1,1) 1,0 80.3,0 ccw(c80.3,1.18) 81.134,0.346 cw(c81.969,-0.489) 81.969,0.691 90.231,0.691 cw(c90.231,-0.489) 91.066,0.346 ccw(c91.9,1.18) 91.9,0 154,0 ccw(c154,1) 155,1 155,62.5 ccw(c154,62.5) 154,63.5 1,63.5 ccw(c1,62.5) 0,62.5 0,39.381 ccw(c2.717,39.381) 0.796,37.46 0.962,37.294 cw(c-0.876,35.751) 1.524,35.751 ; 1.524,27.751 1.524,35.751 ; 1.524,27.751 1.524,35.751
Top Assembly:
  drawing of 40 lines, arcs and shapes, not listed
Bottom Assembly:
  lines w0.1: 67.94,41.7 67.94,44.8 69.24,44.8 69.24,41.7 67.94,41.7 ; 70.48,41.7 70.48,44.8 71.78,44.8 71.78,41.7 70.48,41.7 ; 73.02,41.7 73.02,44.8 74.32,44.8 74.32,41.7 73.02,41.7 ; 75.56,41.7 75.56,44.8 76.86,44.8 76.86,41.7 75.56,41.7 ; 78.1,41.7 79.4,41.7 79.4,44.8 78.1,44.8 78.1,41.7 ; 80.7,41.7 80.7,44.8 81.9,44.8 81.9,41.7 80.7,41.7
Top Impedance Info:
  lines w0.1: 12.1,31.95 12.3,31.95 12.35,32 12.35,32.016 12.409,32.075 21.9,32.075 cw(c21.9,31.775) 22.2,31.775 22.2,31.3 ; 12.1,32.45 12.3,32.45 12.35,32.4 12.35,32.384 12.409,32.325 21.9,32.325 cw(c21.9,31.775) 22.45,31.775 22.45,31.3 ; 22.119,31.26 22.12,31.259 22.125,31.259 22.159,31.259 22.2,31.3 ; 22.525,31.259 22.491,31.259 22.45,31.3 ; 125.85,20.375 125.85,19.703 ccw(c126.703,19.703) 126.1,19.1 ccw(c127.066,20.066) 127.066,18.7 133.394,18.7 ; 129.225,21.25 129.231,21.256 131.536,21.256 ccw(c131.536,22.85) 133.13,22.85 133.13,28.131 133.13,28.132 133.13,29.195 ; 135.714,18.7 135.72,18.706 136.481,18.706 ccw(c136.481,20.3) 138.074,20.3 138.074,35.207 cw(c138.984,35.207) 138.984,36.117 ; 22.2,31.3 22.2,31.3 ; 22.45,31.3 22.45,31.3
  text "50 ohm single-ended impedance" at 123.19,45.974 h3.05
  text "90 ohm diff impedance" at 9.69,27.774 h3.05
Top Component Outline:
  pour cut-out: 113.587,64.756 134.329,64.756 134.329,55.804 113.587,55.804
  pour cut-out: 111.349,66.994 136.567,66.994 136.567,53.566 111.349,53.566
  lines w0.125: 113.587,55.804 134.329,55.804 134.329,64.756 113.587,64.756 113.587,55.804

## Dimensions
154,0 to 90.17,55.881 on Dimensions
154,0 to 66.04,40.641 on Dimensions
154,0 to 66.04,12.701 on Dimensions
154,0 to 96.52,7.621 on Dimensions
154,0 to 154,63.5 on Dimensions
0,1 to 96.52,7.621 on Dimensions
0,1 to 66.04,12.701 on Dimensions
0,1 to 15.24,55.881 on Dimensions
0,1 to 13.97,7.621 on Dimensions
0,1 to 155,1 on Dimensions
0,1 to 144.829,63.501 on Dimensions
0,1 to 90.17,55.881 on Dimensions
154,1 to 160.7,-3.566 on Dimensions

## Text inside footprints (layer, text, board x,y; h text height)
A2: Top Component Info "COPPER KEEPOUT" at 131.65,41.3 h0.2 r180
J6: Top Component Outline "Board Edge" at 2.185,33.725 h0.38 r270
LOGO2: Bottom Overlay "S" at 21.171,8.75 h1.35 r90; Bottom Overlay "E" at 21.171,7.861 h1.35 r90; Bottom Overlay "G" at 21.171,7.077 h1.35 r90; Bottom Overlay "G" at 21.171,6.086 h1.35 r90; Bottom Overlay "E" at 21.171,5.062 h1.35 r90; Bottom Overlay "R" at 21.171,4.227 h1.35 r90; Bottom Overlay "TM" at 22.609,8.964 h0.94 r90; Bottom Overlay "www.segger.com" at 24.181,12.352 h1.68 r90; Bottom Overlay "J-Link" at 23.03,12.433 h1.45 r90; Bottom Overlay "Technology" at 23.03,7.681 h1.45 r90
P18: Top Overlay "1" at 91.3,20.55 h1.02
P19: Top Overlay "1" at 7.468,55.931 h1.5
P25: Top Overlay "1" at 72.125,20.55 h1.02
P28: Top Overlay "1" at 95.364,9.372 h1.5
U3: Top Component Info "B30" at 27.627,31.42 h0.08; Top Component Info "C31" at 28.247,31.019 h0.08; Top Component Info "E31" at 28.247,30.619 h0.08; Top Component Info "A27" at 27.023,31.82 h0.08; Top Component Info "B28" at 27.227,31.42 h0.08; Top Component Info "A25" at 26.623,31.82 h0.08; Top Component Info "B26" at 26.827,31.42 h0.08; Top Component Info "G31" at 28.247,30.219 h0.08; Top Component Info "J31" at 28.247,29.819 h0.08; Top Component Info "L31" at 28.247,29.419 h0.08; Top Component Info "N31" at 28.247,29.019 h0.08; Top Component Info "R31" at 28.247,28.619 h0.08; Top Component Info "U31" at 28.247,28.219 h0.08; Top Component Info "A23" at 26.223,31.819 h0.08; Top Component Info "A21" at 25.823,31.819 h0.08; Top Component Info "B20" at 25.627,31.42 h0.08; Top Component Info "A19" at 25.423,31.82 h0.08; Top Component Info "A17" at 25.023,31.82 h0.08; Top Component Info "A15" at 24.623,31.82 h0.08; Top Component Info "B18" at 25.227,31.42 h0.08; Top Component Info "B14" at 24.427,31.42 h0.08; Top Component Info "B24" at 26.427,31.42 h0.08; Top Component Info "B22" at 26.027,31.42 h0.08; Top Component Info "B16" at 24.827,31.42 h0.08; Top Component Info "W31" at 28.247,27.819 h0.08; Top Component Info "AA31" at 28.247,27.419 h0.08; Top Component Info "AC31" at 28.247,27.019 h0.08; Top Component Info "AE31" at 28.247,26.619 h0.08; Top Component Info "AG31" at 28.247,26.219 h0.08; Top Component Info "AJ31" at 28.247,25.819 h0.08; Top Component Info "AK30" at 27.587,25.42 h0.08; Top Component Info "AL29" at 27.381,25.02 h0.08; Top Component Info "AK26" at 26.787,25.42 h0.08; Top Component Info "AK28" at 27.187,25.42 h0.08; Top Component Info "AL27" at 26.981,25.02 h0.08; Top Component Info "AL25" at 26.581,25.02 h0.08; Top Component Info "AK22" at 25.987,25.42 h0.08; Top Component Info "AK18" at 25.187,25.42 h0.08; Top Component Info "AK16" at 24.787,25.42 h0.08; Top Component Info "AK14" at 24.387,25.42 h0.08; Top Component Info "AK24" at 26.387,25.42 h0.08; Top Component Info "AK20" at 25.587,25.419 h0.08; Top Component Info "AL23" at 26.181,25.02 h0.08; Top Component Info "AL21" at 25.781,25.02 h0.08; Top Component Info "AL19" at 25.381,25.02 h0.08; Top Component Info "AL17" at 24.981,25.02 h0.08; Top Component Info "AL15" at 24.581,25.02 h0.08; Top Component Info "A13" at 24.223,31.819 h0.08; Top Component Info "B12" at 24.027,31.42 h0.08; Top Component Info "B8" at 23.256,31.42 h0.08; Top Component Info "B10" at 23.627,31.42 h0.08; Top Component Info "B6" at 22.856,31.42 h0.08; Top Component Info "A5" at 22.653,31.82 h0.08; Top Component Info "B4" at 22.456,31.42 h0.08; Top Component Info "B2" at 22.072,31.406 h0.08; Top Component Info "D2" at 21.797,30.819 h0.08; Top Component Info "F2" at 21.797,30.419 h0.08; Top Component Info "H2" at 21.797,30.019 h0.08; Top Component Info "K2" at 21.797,29.619 h0.08; Top Component Info "C1" at 21.456,31.019 h0.08; Top Component Info "E1" at 21.476,30.619 h0.08; Top Component Info "J1" at 21.456,29.819 h0.08; Top Component Info "G1" at 21.456,30.219 h0.08; Top Component Info "M2" at 21.797,29.219 h0.08; Top Component Info "P2" at 21.797,28.819 h0.08; Top Component Info "T2" at 21.797,28.419 h0.08; Top Component Info "V2" at 21.797,28.019 h0.08; Top Component Info "L1" at 21.436,29.419 h0.08; Top Component Info "N1" at 21.476,29.019 h0.08; Top Component Info "R1" at 21.469,28.619 h0.08; Top Component Info "U1" at 21.456,28.219 h0.08; Top Component Info "AK12" at 23.987,25.42 h0.08; Top Component Info "AK8" at 23.217,25.42 h0.08; Top Component Info "AK6" at 22.817,25.42 h0.08; Top Component Info "AK10" at 23.587,25.419 h0.08; Top Component Info "AL13" at 24.181,25.02 h0.08; Top Component Info "AL11" at 23.781,25.02 h0.08; Top Component Info "AL9" at 23.381,25.02 h0.08; Top Component Info "AK4" at 22.417,25.42 h0.08; Top Component Info "AL7" at 23.01,25.02 h0.08; Top Component Info "AL5" at 22.61,25.02 h0.08; Top Component Info "AL3" at 22.21,25.02 h0.08; Top Component Info "Y2" at 21.797,27.619 h0.08; Top Component Info "W1" at 21.456,27.819 h0.08; Top Component Info "AA1" at 21.391,27.419 h0.08; Top Component Info "AB2" at 21.717,27.219 h0.08; Top Component Info "AD2" at 21.717,26.819 h0.08; Top Component Info "AC1" at 21.384,27.019 h0.08; Top Component Info "AK2" at 22.017,25.446 h0.08; Top Component Info "AF2" at 21.717,26.419 h0.08; Top Component Info "AE1" at 21.404,26.619 h0.08; Top Component Info "AH2" at 21.717,26.019 h0.08; Top Component Info "AG1" at 21.384,26.219 h0.08; Top Component Info "AJ1" at 21.384,25.819 h0.08